# Altium PCB ATTiny85.PcbDoc
Units mm, origin at the board's own origin, x right, y up, seen from the top; angles counter-clockwise.
Board outline 26.85 x 19.23 mm, 2 copper layers (Top Layer, Bottom Layer); 17 components, 14 nets, 48 pads, 14 vias.
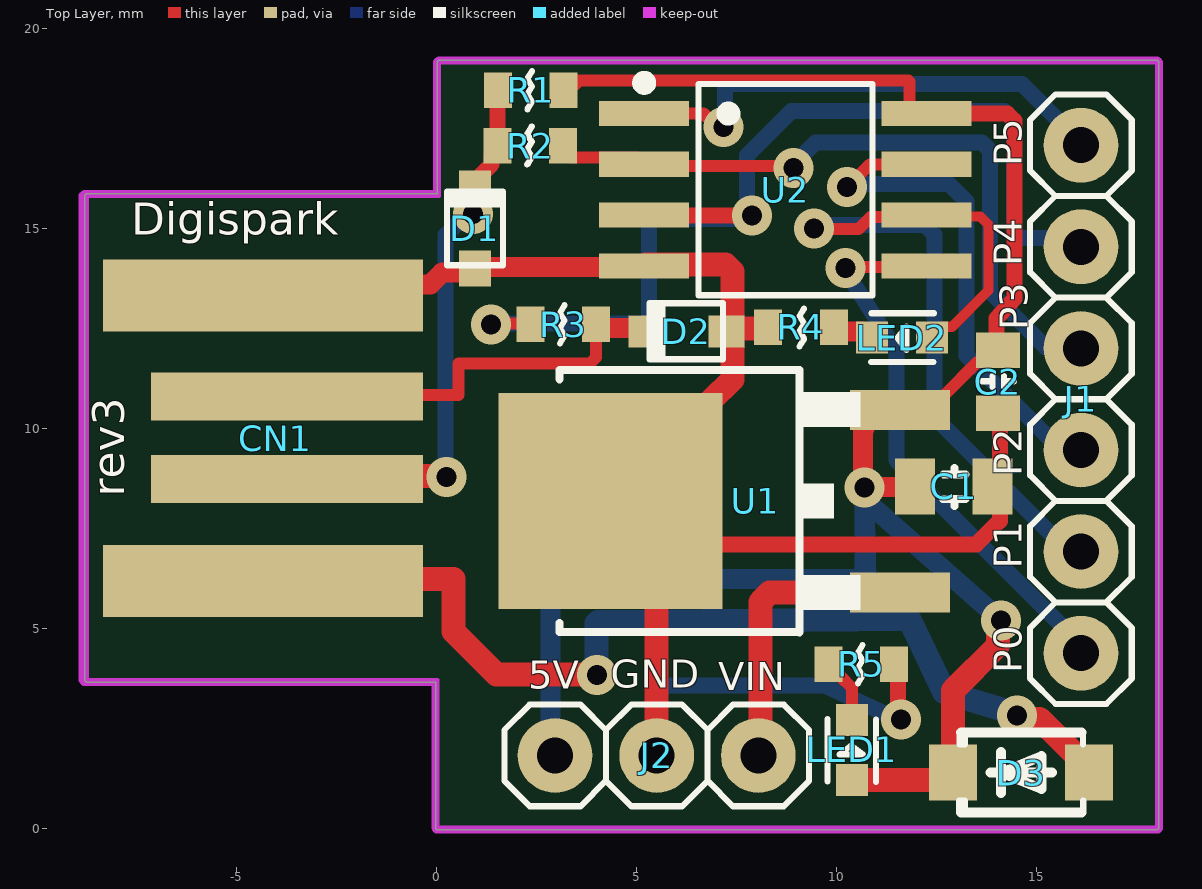
[diagram p0: Top Layer view]
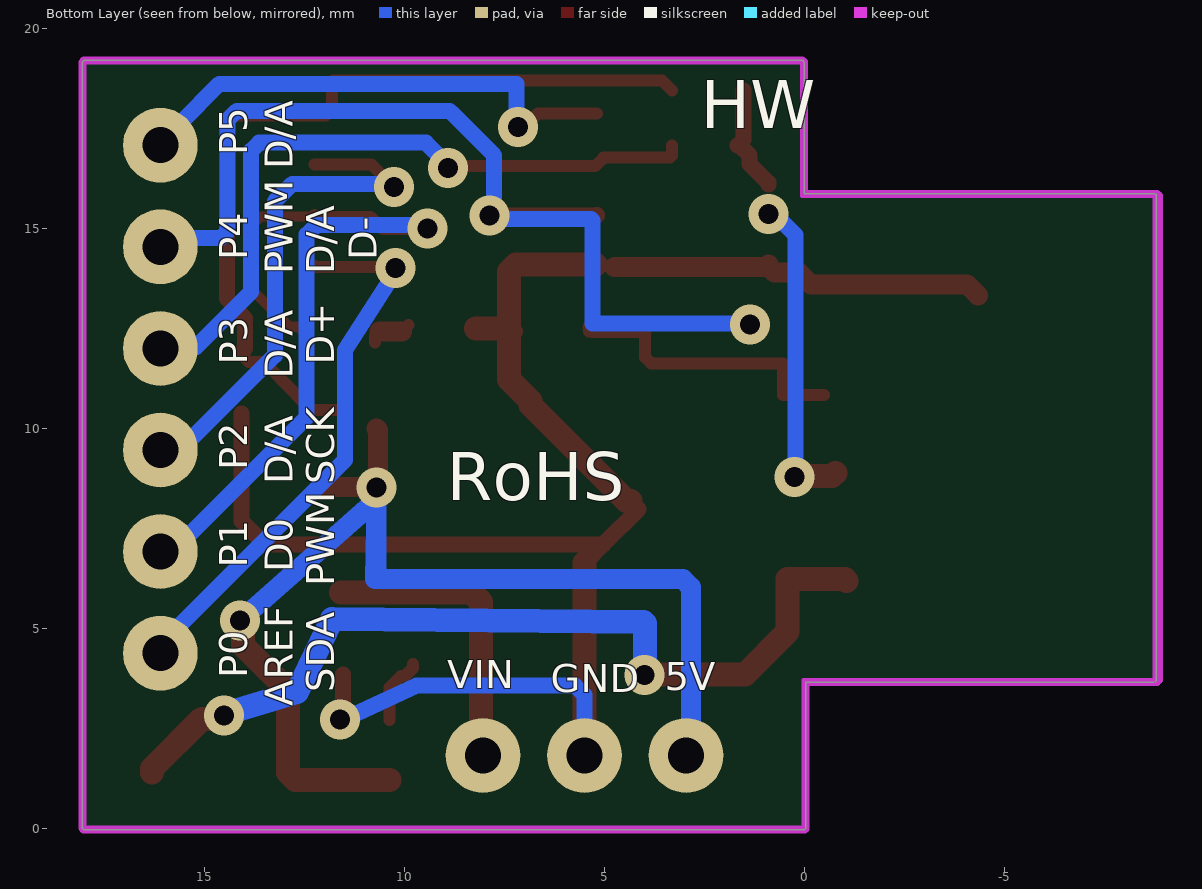
[diagram p1: Bottom Layer view, seen from below]
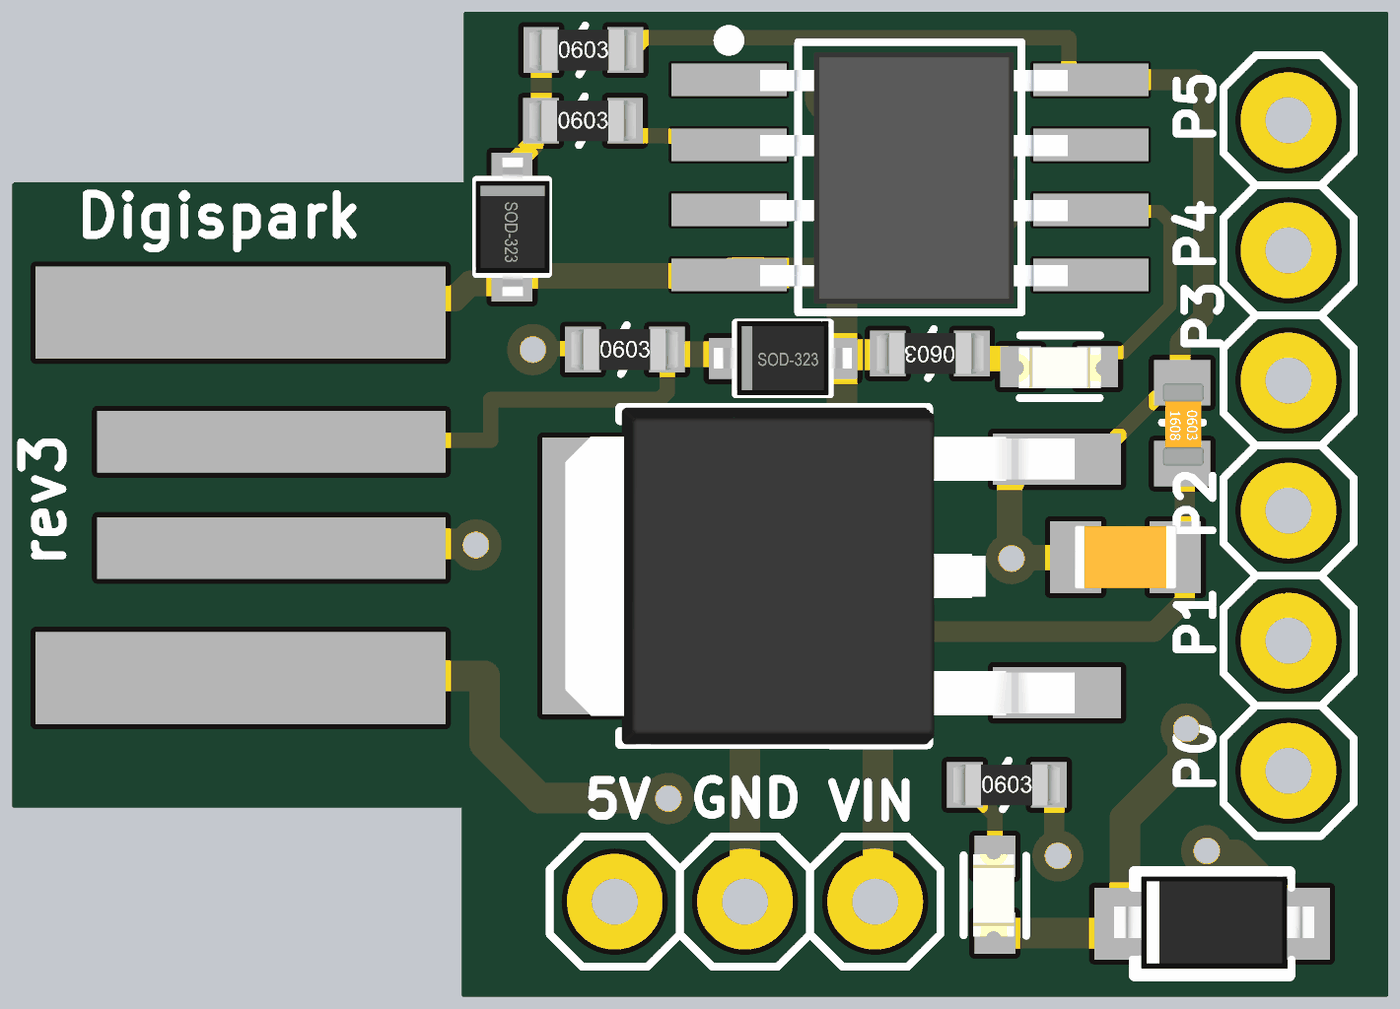
[diagram p2: 3D render of the assembled board from above, using the file's embedded part models]

## Layer stack, top to bottom
Top Solder: solder mask 0.0102, Solder Resist, Dk 3.5
Top Layer: signal copper 0.0356
Dielectric 1: dielectric 0.32, FR-4, Dk 4.8
Bottom Layer: signal copper 0.0356
Bottom Solder: solder mask 0.0102, Solder Resist, Dk 3.5

## Board outline
18.01,-0.03 0.032,-0.03 cw(c0.032,0.02) -0.018,0.02 -0.018,3.661 -8.739,3.661 cw(c-8.739,3.711) -8.789,3.711 -8.789,15.815 cw(c-8.739,15.815) -8.739,15.865 0.022,15.865 0.022,19.149 cw(c0.072,19.149) 0.072,19.199 18.01,19.199 cw(c18.01,19.149) 18.06,19.149 18.06,0.02 cw(c18.01,0.02)

## Design rules (kind name [scope] priority, off if disabled: settings)
Clearance [All] p1: gap=0.254 ignorepadtopadclearanceinfootprint=FALSE
DiffPairsRouting [All] p1: maxlimit=0.254 minlimit=0.254 mostfreqgap=0.254 toplayer_minwidth=0.381 toplayer_maxwidth=0.381 toplayer_prefwidth=0.381 bottomlayer_minwidth=0.381 bottomlayer_maxwidth=0.381 bottomlayer_prefwidth=0.381 maxuncoupledlength=12.7
PolygonConnect [All] p1: connectstyle=Relief reliefconductorwidth=0.254 reliefentries=4 polygonreliefangle="90 Angle" airgapwidth=0.254
RoutingVias [All] p1: holewidth=0.711 width=1.27 viastyle="Through Hole" minholewidth=0.711 minwidth=1.27 maxholewidth=0.711 maxwidth=1.27
SolderMaskExpansion [All] p1: expansion=0.102 istentingtop=FALSE
SupplyNets "Schematic Supply Nets_2" [InNet('GND')] p1: voltage=0.000
SupplyNets "Schematic Supply Nets_1" [InNet('VIN')] p2: voltage=0.000
SupplyNets "Schematic Supply Nets" [InNet('VCC5V')] p3: voltage=0.000
Width [All] p1: maxlimit=2 minlimit=0.2 preferedwidth=0.254
29 further rules are at their usual default settings.

## Classes and differential pairs
differential pair D: +D_P -D_N

## Components (designator, comment, footprint, x,y, rotation, side; value= is the part's Value field where it differs from the comment)
C1 "4.7uF" C0805 12.932,8.526 r0 top
C2 "100nF" C0603 14.039,11.168 r270 top
CN1 "USB ConnectorsUSBMINIB - Surface Mount Female Mini-B USB Connector 4UConnector: 06564   By microbuilder.euThru-hole RA Female Mini-B USB Connector 4UConnector: 18732   By ladyada.net" USB-A-PCB -4.032,9.758 r270 top locked
D1 "BZT52C3V6S" SOD-323 0.966,14.996 r270 top
D2 "BZT52C3V6S" SOD-323 6.25,12.429 r0 top
D3 "1N5819" SOD-123HE1_L3.0-W2.0-LS3.7-RD 14.621,1.397 r0 top
J1 "Header 6" HDR1X6 16.113,17.081 r270 top
J2 "Header 3" HDR1X3 8.049,1.826 r180 top
LED1 "LED Red" CHIP-LED0603 10.384,1.962 r0 top
LED2 "LED Green" CHIP-LED0603 11.639,12.27 r90 top
R1 "1.5kΩ" R0603-NO 2.354,18.452 r0 top
R2 "66.5Ω" R0603-NO 2.349,17.072 r0 top
R3 "66.5Ω" R0603-NO 3.167,12.603 r0 top
R4 "1kΩ" R0603-NO 9.115,12.527 r180 top
R5 "1kΩ" R0603-NO 10.618,4.106 r0 top
U1 "78M05" TO252 6.916,8.183 r90 top
U2 "ATTINY85-20SU" SOIC8_208MIL 8.725,15.968 r270 top

## Footprints (in the part's own frame and the unit in brackets; to place one, negate y for a bottom-side part, rotate by r counter-clockwise, add the part's x,y. Pads: shape width x height; smd on the part's side, far side on the other; paste and mask are expansions set on the pad)
C0603 [mm]
  rect 0.889x1.1 smd: 1(-0.79,0) 2(0.79,0)
  silkscreen extent -0.14,-0.39 0.13,0.41, body extent -0.77,-0.38 0.83,0.42, height 0.8
C0805 [mm]
  rect 1x1.4 smd: 1(-0.971,0.025) 2(0.975,0.025)
  silkscreen extent -0.26,-0.46 0.3,0.48, body extent -1,-0.6 1,0.65, height 0.85
CHIP-LED0603 [mil]
  rect 31.5x31.5 smd: A(0,-29.53) C(0,29.53)
  silkscreen extent -24,-31 24,30, body extent -17,-32 15,31, height 22
HDR1X3 [mm]
  round 1.869 hole 0.9: 1(0,0) 2(2.54,0) 3(5.08,0)
  silkscreen extent -1.27,-1.27 6.35,1.27
HDR1X6 [mm]
  round 1.869 hole 0.9: 1(0,0) 2(2.54,0) 3(5.08,0) 4(7.62,0) 5(10.16,0) 6(12.7,0)
  silkscreen extent -1.27,-1.27 13.97,1.27
R0603-NO [mm]
  rect 0.7x0.889 smd: 1(-0.82,0) 2(0.82,0)
  silkscreen extent -0.08,-0.48 0.04,0.48, body extent -1.06,-0.4 1.04,0.4, height 0.5
SOD-123HE1_L3.0-W2.0-LS3.7-RD [mm]
  rect 1.2x1.4 smd: 1(-1.7,0) 2(1.7,0)
  silkscreen extent -1.55,-1 1.55,1, body extent -1.91,-0.88 1.99,0.92, height 1.18
SOD-323 [mm]
  rect 0.9x0.8 smd: A(1,0) K(-1,0)
  silkscreen extent -0.92,-0.7 0.92,0.71, body extent -1.35,-0.71 1.35,0.73, height 1.17
SOIC8_208MIL [mm]
  rect 0.63x2.25 smd paste+0 mask+0.051: 1(-1.905,-3.53) 2(-0.635,-3.53) 3(0.635,-3.53) 4(1.905,-3.53) 5(1.905,3.53) 6(0.635,3.53) 7(-0.635,3.53) 8(-1.905,3.53)
  silkscreen extent -2.82,-3.68 2.64,2.18, body extent -2.44,-2.92 2.46,3.08, height 1.75
TO252 [mm]
  rect 1x2.5 smd: 1(-2.28,-4.681) 2(2.28,-4.681)
  rect 5.4x5.6 smd: 3(0,2.56)
  silkscreen extent -3.28,-3.68 3.28,3.84, body extent -3.29,-5.03 3.29,4.91, height 2.29
USB-A-PCB [mm]
  rect 1.8x8 smd paste+0: 1(3.567,-0.3) 4(-3.567,-0.3)
  rect 1.2x6.8 smd paste+0: 2(1.027,0.3) 3(-1.046,0.3)
  Keep-Out Layer lines w0.2: 6.047,-4.816 -6.068,-4.816 ; 6.097,-4.776 6.097,3.955 ; -6.108,-4.766 -6.108,3.994

## Part data
C1: library part Cap_0805, "Capacitor, X5R, ±10%, 6.3V", Manufacturer=N.A., Specification="X7R, ±10%, 16V"
C2: library part Cap_0603, "Capacitor, X5R, ±10%, 6.3V", Manufacturer=N.A., Part Number=C0603-N.C., Volts=6.3V, Artikkelnr Noca=20069060, Artikkelnr Simpro=N.A., Footprint Doc=0603, LatestRevisionDate=2009-11-23, Manufacturer Part Number=N.A., Pin Count=2, Published=2009-05-08, Publisher="Nordic Semiconductor"
CN1: library part USB-A-MALE_PCB, Name=USB-A-PCB
D1 D2: library part DIODE-BZT52C3V6S, "Independent Type 200mW 3.6V~3.8V 3.4V SOD-323 Zener Diodes ROHS", JLCPCB Part Class="Extended Part", Manufacturer=YFW(佑风微), Power Dissipation=200mW, Reverse Leakage Current (Ir)=5uA@1V, Zener Voltage (Nom)=3.4V, Zener Voltage (Range)=3.6V~3.8V, Add into BOM=yes, Convert to PCB=yes, Datasheet=https://atta.szlcsc.com/upload/public/pdf/source/20221116/07630275E16F5BD1867C326257346985.pdf, Device=BZT52C3V6S_C5270767, Diode Configuration="Independent Type", LCSC Part Name=BZT52C3V6S, Manufacturer Part=BZT52C3V6S, Supplier=LCSC, Supplier Footprint=SOD-323, Supplier Part=C5270767, Symbol=BZT52C3V6S_C5270767, Zener Impedance (Zzt)=90Ω
D3: library part DIODE-SOD123, "Schottky Diode"
J1: "Header, 6-Pin", LatestRevisionDate=17-Jul-2002, LatestRevisionNote="Re-released for DXP Platform.", Publisher="Altium Limited"
J2: "Header, 3-Pin", LatestRevisionDate=17-Jul-2002, LatestRevisionNote="Re-released for DXP Platform.", Publisher="Altium Limited"
LED1 LED2: library part LEDCHIP-LED0603, "SMD lamp beads"
R1 R2 R3 R4 R5: library part Res_0603, "Resistor, ±1%, 0.100W", Manufacturer=N.A., Part Number=R0603-N.C.Ω, Artikkelnr Noca=N.A., Artikkelnr Simpro=N.A., Footprint Doc=0603, LatestRevisionDate=2009-05-08, Manufacturer Part Number=N.A., Note="Chip Res", Pin Count=2, Published=2009-05-08, Publisher="Nordic Semiconductor"
U1: library part REG-7805_TO252, "5V Linear Regulator"
U2: "8KB 2.7V~5.5V AVR 512Byte 20MHz FLASH 6 SOIC-8-208mil Microcontrollers (MCU/MPU/SOC) ROHS", JLCPCB Part Class="Extended Part", Low-Voltage Detect=有, Manufacturer=MICROCHIP(美国微芯), Operating Temperature Range=-40℃~+85℃, Operating Voltage Range=2.7V~5.5V, ADC (Bit)=10bit, Add into BOM=yes, CCP Capture/Compare=-, communication protocol=-, Convert to PCB=yes, CPU Core=AVR, CPU Maximum Speed=20MHz, DAC (Bit)=-, Datasheet=https://atta.szlcsc.com/upload/public/pdf/source/20201117/C89852_765368ABD68244126CE6B6218510DF2D.pdf, Device=ATTINY85-20SU, Direct Memory Access=-, EEPROM=512Byte, GPIO Ports Number=6, Infrared Data Association=-, Internal Comparator=-, Internal Oscillator=有, LCSC Part Name=ATTINY85-20SU, Manufacturer Part=ATTINY85-20SU, Peripheral/Function=PWM, Program Memory Type=FLASH, Program Storage Size=8KB, PWM (Bit)=-, RAM Size=512Byte, Real-Time Clock=-, Secure Digital Input and Output=-, Supplier=LCSC, Supplier Footprint=SOIC-8-208mil, Supplier Part=C89852, Symbol=ATTINY85-20SU, Universal Serial Bus=-, Watchdog=有

## Via types
v1: diameter 1, hole 0.5, Top Layer to Bottom Layer, tented both sides, 14 vias

## Nets (pads, with @x,y where several pads share a name; then routed paths per layer and width w, separated by ;. In a path a pad name is that pad's centre, name@x,y a point inside that pad or via, vN(x,y) a via of type N, cw(c..) or ccw(c..) an arc to the next point about the centre after c; other vN are vias at no path point)
D_N: J1.3 R2.2 U2.2 | length 17.2
  Top Layer w0.3: R2.2@3.319,17.072 3.319,16.827 3.369,16.777 3.578,16.777 ; 3.578,16.777 3.973,16.777 3.982,16.768 5.03,16.768 5.241,16.556 8.876,16.556 v1(8.922,16.51)
  Bottom Layer w0.4: v1@8.962,16.589 8.962,16.629 9.477,17.145 13.645,17.145 13.843,16.947 13.843,13.414 15.232,12.025 J1.3@15.748,12.025
D_P: J1.2 R3.1 U2.3 | length 25.7
  Top Layer w0.3: v1@1.381,12.621 R3.1@2.347,12.621
  Top Layer w0.4: U2.3 5.201,15.326 7.883,15.326 v1(7.89,15.319)
  Bottom Layer w0.4: v1@1.461,12.621 5.31,12.621 5.31,15.2 5.35,15.24 7.771,15.24 7.771,16.828 8.842,17.899 ; 8.882,17.939 14.2,17.939 14.438,17.701 14.438,14.922 14.597,14.764 J1.2@15.947,14.764
  other v1: 1.37,12.603
GND: C1.2 C2.2 CN1.4 D1.A D2.A J2.2 R4.2 R5.2 U1.3 U2.4 | length 47.4
  Top Layer w0.4: U1.3@4.156,7.983 U1.3@5.039,7.1 ; U2.4 U2.4@5.232,14.1 ; U1.3@5.509,6.63 U1.3@5.039,7.1 ; D2.A 7.323,12.503 D2.A@7.4,12.503 ; R4.2@8.222,12.503 R4.2@8.295,12.577 ; v1@11.541,2.778 R5.2@11.541,3.85 ; C2.2@14.089,10.378 14.089,7.689 13.5,7.1 U1.3@5.039,7.1
  Top Layer w0.5: CN1.4 -4.056,13.6 -0.15,13.6 0.146,13.896 0.766,13.896 0.916,14.046 D1.A@0.916,14.096 ; D1.A@0.916,14.041 U2.4@4.755,14.041
  Top Layer w0.6: U1.3 4.456,8.183 6.856,10.583 6.856,10.683 7.4,11.227 D2.A@7.4,12.503 ; U2.4@5.232,14.1 7.224,14.1 7.4,13.924 D2.A@7.4,12.503 ; J2.2 U1.3@5.509,6.63 ; R4.2@8.222,12.503 D2.A@7.4,12.503
  Bottom Layer w0.4: J2.2@5.509,1.945 5.509,3.334 5.747,3.572 9.716,3.572 v1@11.581,2.699
  other v1: 11.616,2.72
MISO: J1.5 LED2.A U2.6 | length 20.3
  Top Layer w0.254: U2.6 12.287,15.3 13.6,15.3 13.8,15.1 13.8,13.45 12.893,12.543 12.662,12.543 LED2.A
  Top Layer w0.3: v1(9.438,15.002) 9.454,14.986 10.557,14.986 10.856,15.285 12.207,15.285 U2.6
  Bottom Layer w0.4: v1@9.438,15.081 12.216,15.081 12.454,14.843 12.454,10.279 J1.5@15.589,7.144
NetCN1_1: CN1.1 D3.2 | length 22.3
  Top Layer w0.6: CN1.1@-1.04,6.191 -1,6.231 0.429,6.231 0.429,4.921 1.5,3.85 v1@4.001,3.85 ; v1(14.518,2.818) 14.594,2.741 15.077,2.741 16.321,1.497 D3.2
  Bottom Layer w0.6: v1@4.001,3.85 4.001,5.12 4.04,5.159 11.819,5.239 12.692,3.413 v1@14.518,2.857
  other v1: 4.014,3.84
NetCN1_2: CN1.2 D1.K R1.1 R2.1 | length 10.8
  Top Layer w0.4: D1.K@0.916,16.096 0.916,16.146 1.379,16.61 1.379,16.827 1.624,17.072 1.679,17.072 1.532,17.219 R1.1@1.532,18.45
  Top Layer w0.6: CN1.2@-0.762,8.89 -0.683,8.811 v1@0.31,8.811
  Bottom Layer w0.4: v1@0.232,8.816 0.232,14.832 0.766,15.366 v1(0.91,15.366)
  other v1: 0.259,8.789
NetCN1_3: CN1.3 D2.K R3.2 | length 7.6
  Top Layer w0.3: CN1.3@-0.484,10.835 0.548,10.835 0.548,11.628 3.844,11.628 3.993,11.777 R3.2@3.993,12.597 ; R3.2 R3.2@3.993,12.597 ; R3.2@4.074,12.516 R3.2@3.993,12.597 ; D2.K@5.313,12.516 D2.K@5.4,12.429
  Top Layer w0.5: R3.2@4.074,12.516 D2.K@5.313,12.516
NetJ1_1: J1.1 U2.1 | length 12.5
  Top Layer w0.3: U2.1 6.677,17.873 7.007,17.542 v1(7.176,17.542)
  Bottom Layer w0.4: v1@7.215,17.502 7.215,18.613 14.637,18.613 15.629,17.621 15.629,17.462 J1.1@15.827,17.264
NetJ1_4: J1.4 U2.7 | length 12.8
  Top Layer w0.3: v1(10.271,16.034) 10.84,16.603 U2.7
  Bottom Layer w0.4: v1@10.232,16.113 12.811,16.113 13.248,15.677 13.248,11.827 15.51,9.565 15.708,9.565 J1.4@15.827,9.446
NetJ1_6: J1.6 U2.5 | length 13.4
  Top Layer w0.3: v1(10.232,14.01) 10.258,14.036 12.228,14.036 U2.5
  Bottom Layer w0.4: v1@10.232,13.93 11.502,11.946 11.502,9.207 15.827,4.882 J1.6@15.986,4.882
NetLED1_C: LED1.C R5.1 | length 1.7
  Top Layer w0.3: R5.1 9.798,4.012 9.998,3.812 10.092,3.812 10.384,3.519 LED1.C
NetLED2_C: LED2.C R4.1 | length 1.1
  Top Layer w0.3: R4.1@9.914,12.581 R4.1@10.072,12.423 ; LED2.C@10.638,12.423 10.747,12.314 LED2.C@10.747,12.144
  Top Layer w0.5: R4.1@10.072,12.423 LED2.C@10.638,12.423
VCC5V: C1.1 C2.1 D3.1 J2.3 LED1.A R1.2 U1.2 U2.8 | length 52.1
  Top Layer w0.3: R1.2@3.324,18.452 3.567,18.695 11.801,18.695 11.827,18.669 11.827,18.038 U2.8@11.992,17.873 ; U1.2 12.347,10.463 12.697,10.813 12.697,10.832 13.528,11.663 13.9,11.663 C2.1@14.117,11.88
  Top Layer w0.4: U2.8@11.992,17.873 14.274,17.873 14.45,17.697 14.45,13.25 14,12.75 14,11.996 C2.1@14.117,11.88
  Top Layer w0.5: v1@10.668,8.295 10.668,9.962 U1.2@10.708,10.001 ; v1(10.708,8.526) 10.721,8.538 11.922,8.538 C1.1@11.935,8.526
  Top Layer w0.6: LED1.A 12.736,1.212 D3.1 12.921,3.454 14.044,4.577 14.044,5.123 v1(14.121,5.199)
  Bottom Layer w0.5: J2.3@2.929,1.786 2.85,1.865 2.85,6.032 3.048,6.231 10.708,6.231 ; v1(10.708,8.526) v1@10.708,8.215 ; v1(14.121,5.199) 10.728,8.198 v1@10.708,8.215 ; 10.708,6.231 10.747,6.231 v1@10.708,8.215 ; 10.708,6.231 v1@10.708,8.215
VIN: J2.1 U1.1 | length 7.5
  Top Layer w0.6: J2.1 8.1,1.877 8.1,5.666 8.334,5.9 11.594,5.9 U1.1

## Keep-outs
Keep-Out Layer:
  lines w0.1: 0.032,0.179 0.032,3.711 -8.739,3.711 -8.739,15.815 0.072,15.815 0.072,19.149 3.762,19.149 18.01,19.149 18.01,0.02 0.032,0.02 0.032,0.218
  lines w0.2: -8.789,3.711 -8.789,15.825 -8.781,15.844 -8.767,15.858 -8.739,15.865 0.022,15.865 0.022,19.159 0.029,19.178 0.043,19.192 0.072,19.199 18.02,19.199 18.039,19.192 18.053,19.178 18.06,19.149 18.06,0.01 18.053,-0.009 18.039,-0.023 18.01,-0.03 0.022,-0.03 0.004,-0.023 -0.01,-0.009 -0.018,0.02 -0.018,3.661 -8.749,3.661 -8.767,3.668 -8.781,3.682 -8.789,3.711

## Silkscreen, mask and mechanical layers (free items; w line width, h text height)
Top Overlay:
  text "P5" at 14.637,16.554 h0.7 r90
  text "Digispark" at -7.624,14.836 h0.8
  text "P4" at 14.637,14.06 h0.7 r90
  text "P3" at 14.787,12.459 h0.7 r90
  text "P2" at 14.637,8.808 h0.7 r90
  text "rev3" at -7.801,8.295 h0.8 r90
  text "P1" at 14.637,6.487 h0.7 r90
  text "P0" at 14.637,3.875 h0.7 r90
  text "GND" at 4.362,3.511 h0.7
  text "5V" at 2.293,3.492 h0.7
  text "VIN" at 7.042,3.454 h0.7
Bottom Overlay:
  text "HW" at 2.6,17.5 h1.2
  text "P5" at 13.945,16.828 h0.7 r270
  text "D/A" at 12.802,16.481 h0.7 r270
  text "D-" at 10.706,14.21 h0.7 r270
  text "P4" at 13.945,14.21 h0.7 r270
  text "D/A" at 11.769,13.86 h0.7 r270
  text "PWM" at 12.802,13.86 h0.7 r270
  text "D+" at 11.769,11.592 h0.7 r270
  text "P3" at 13.945,11.592 h0.7 r270
  text "D/A" at 12.802,11.242 h0.7 r270
  text "P2" at 13.945,8.952 h0.7 r270
  text "SCK" at 11.769,8.602 h0.7 r270
  text "D/A" at 12.802,8.602 h0.7 r270
  text "RoHS" at 8.95,8.2 h1.2
  text "P1" at 13.945,6.519 h0.7 r270
  text "D0" at 12.802,6.402 h0.7 r270
  text "PWM" at 11.769,6.052 h0.7 r270
  text "P0" at 13.945,3.752 h0.7 r270
  text "VIN" at 8.942,3.511 h0.7
  text "5V" at 3.498,3.452 h0.7
  text "GND" at 6.348,3.402 h0.7
  text "SDA" at 11.769,3.402 h0.7 r270
  text "AREF" at 12.802,3.052 h0.7 r270
Mechanical 3:
  drawing of 37 lines, arcs and shapes, not listed
  text "D5/A0" at 18.498,16.046 h2
  text "D4/PWM4/A2/USB-" at 18.498,13.576 h2
  text "D3/A3/USB+" at 18.498,11.106 h2
  text "D2/A1/SCK/SCL" at 18.45,8.85 h2
  text "D1 /PWM1 /MISO" at 18.498,6.165 h2
  text "DO/PWMO/AREF/MOSI/SDA" at 18.498,3.695 h2
  text "D: Digital Read/Write  / A: Analog Read (ADC)  / PWM: Analog Write  / MOSI/MISO/SCK: SPI  / SDA/SCL: I2C  / USB+/-: USB Interface  / AREF: Analog Reference" at -10.1,-16.062 h2